# EAGLE board main3 (EAGLE 8.2.0)
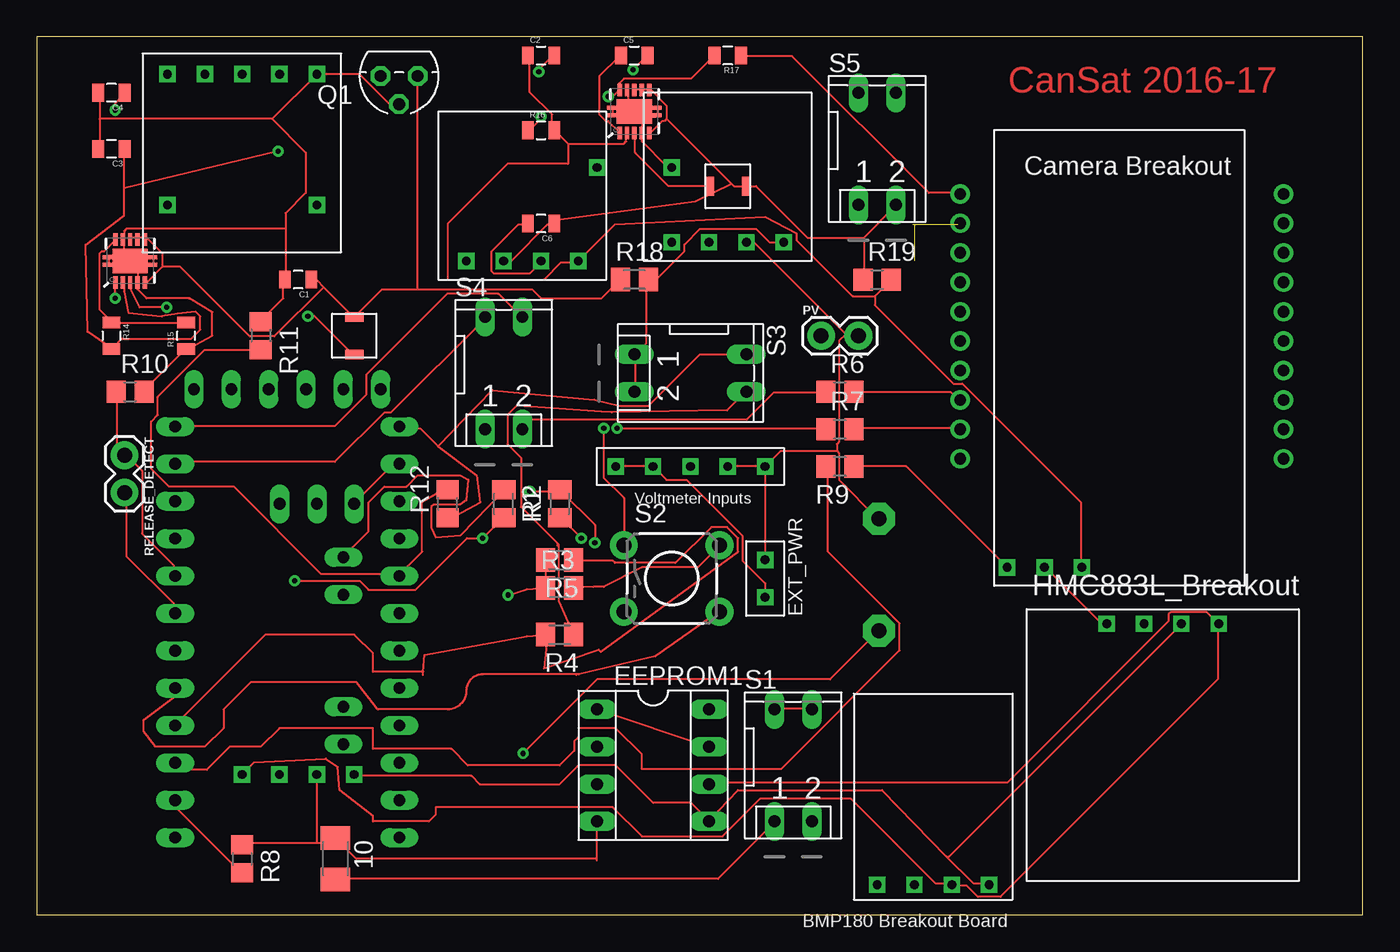
[diagram p0: board, top side]
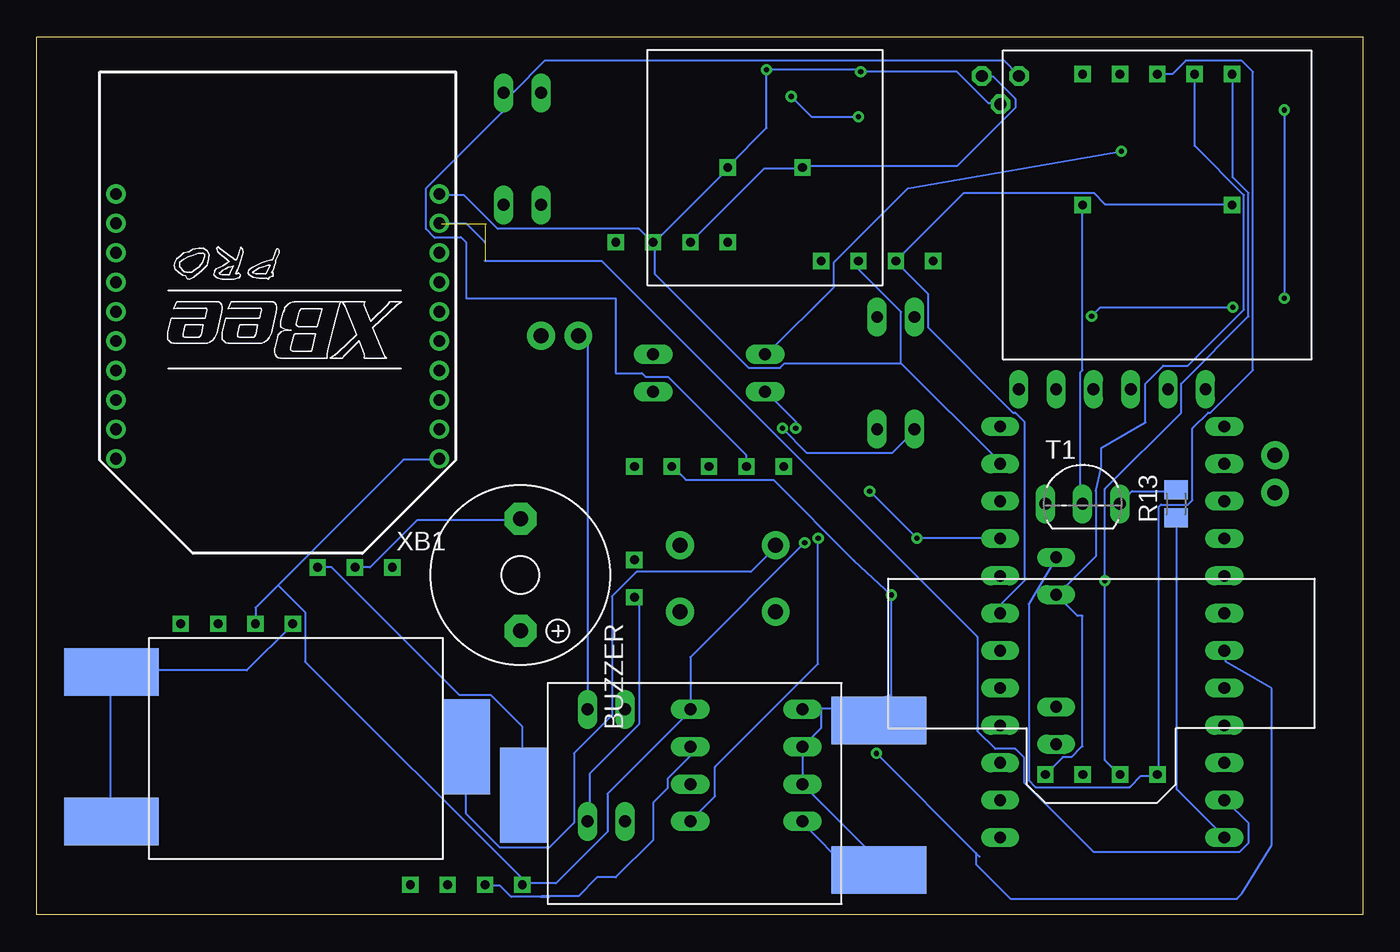
[diagram p1: board, bottom side, seen from below]

Size 90.17 x 59.69 mm. Coordinates in mm from the lower left corner, seen from the top.
Outline: 0,0 90.17,0 90.17,59.69 0,59.69 0,0
Copper layers (1*16): Top 0.035mm / dielectric 1.5mm / Bottom 0.035mm
Design rules "default": minimum track width 6mil, minimum drill 0.35mm, track to track 6mil, track to pad 6mil, pad to pad 6mil, via to via 6mil, smd to smd 6mil, copper to edge 40mil, drill to drill 6mil, minimum pad ring 10mil, minimum via ring 8mil, stop-mask expansion 4mil, vias tented up to drill 0mil, thermal gap 10mil

## Footprints (pad centres in the part's own frame; a part is rotated, then mirrored left to right if it is on the bottom)
M1206 = smd 1.6 x 2: 1 -1.4,0; 2 1.4,0
F/TMB = drill 1.016 pad 2.159 octagon: + 3.81,0; - -3.81,0
0805 = smd 0.8 x 1.2: 1 -0.9,0; 2 0.9,0
1F_CAP = drill 0.6 square: + 5.08,0; - -5.08,0
SOCKET-08 = drill 0.813 long: 1 -3.81,-3.81; 2 -1.27,-3.81; 3 1.27,-3.81; 4 3.81,-3.81; 5 3.81,3.81; 6 1.27,3.81; 7 -1.27,3.81; 8 -3.81,3.81
1212 = smd 0.635 x 1.27: P$1 -1.27,0; P$2 1.27,0
0.47F_CAP = drill 0.6 square: + 2.54,0; - -2.54,0
SENSIRIONSDP810 = drill 0.6 square: GND -8.24,1.26; SCL -8.24,-3.82; SDA -8.24,3.8; VCC -8.24,-1.28
1X02 = drill 1.016 pad 1.88: 1 0,0; 2 2.54,0
TO-92 = drill 0.813 octagon: 1 -1.27,0; 2 0,1.905; 3 1.27,0
M0805 = smd 1.3 x 1.6: 1 -0.95,0; 2 0.95,0
R0805 = smd 1.3 x 1.5: 1 -0.95,0; 2 0.95,0
DP-02 = drill 0.813 long: 1 -1.27,-3.81; 2 1.27,-3.81; 3 1.27,3.81; 4 -1.27,3.81
TACTILE-PTH = drill 1.016 pad 1.88: 1 -3.251,2.261; 2 3.251,2.261; 3 -3.251,-2.261; 4 3.251,-2.261
TO92-ECB = drill 0.813 long: B 2.54,0; C 0,0; E -2.54,0
QFN-10_PAD = smd 0.297 x 0.85: 1 -1,-1.475; 2 -0.5,-1.475; 3 0,-1.475; 4 0.5,-1.475; 5 1,-1.475; 6 1,1.475; 7 0.5,1.475; 8 0,1.475; 9 -0.5,1.475; 10 -1,1.475 | smd 0.7 x 0.28: 11 -1.5,0.25; 12 -1.5,-0.25; 13 1.5,0.25; 14 1.5,-0.25 | smd 2.4 x 1.65: 15 0,0
PRO-MINI-2 = drill 0.8 long: A0 6.35,2.54; A1 6.35,0; A2 6.35,-2.54; A3 6.35,-5.08; A4 2.54,1.27; A5 2.54,3.81; A6 2.54,-8.89; A7 2.54,-6.35; D2 -8.89,2.54; D3 -8.89,0; D4 -8.89,-2.54; D5 -8.89,-5.08; D6 -8.89,-7.62; D7 -8.89,-10.16; D8 -8.89,-12.7; D9 -8.89,-15.24; D10 6.35,-15.24; D11 6.35,-12.7; D12 6.35,-10.16; D13 6.35,-7.62; DTR 5.08,15.24; GND 6.35,10.16; GND1 -8.89,5.08; GND2 -7.62,15.24; GND3 -5.08,15.24; RAW 6.35,12.7; RST 6.35,7.62; RST1 -8.89,7.62; RX1 -8.89,10.16; RX1-1 0,15.24; TX0 -8.89,12.7; TX0-1 2.54,15.24; VCC 6.35,5.08; VCC1 -2.54,15.24
HMC5833L_BREAKOUT = drill 0.6 square: GND -3.81,8.25; SCL 3.81,8.25; SDA 1.27,8.25; VCC -1.27,8.25
BMP180_BREAKOUT = drill 0.6 square: GND -1.27,-6; SCL 1.27,-6; SDA 3.81,-6; VIN -3.81,-6
CAMERA = drill 0.6 square: GND 5.08,15.24; TRG 7.62,15.24; VCC 2.54,15.24
EXTERNALPOWER = drill 0.6 square: GND 1.27,0; VCC -1.27,0
VOLTMETER = drill 0.6 square: A -5.08,0; B -2.54,0; C 2.54,0; D 5.08,0; NULL 0,0
RTC = drill 0.6 square: GND 1.27,1.27; NC 3.81,1.27; SCL 6.35,1.27; SDA 8.89,1.27; VCC 11.43,1.27
BESTCAP = smd 6.452 x 3.251: GND -2.54,12.7; GND2 -2.54,2.54 | smd 3.251 x 6.452: VCC 21.59,7.62
POLOLU3VREG = drill 0.6 square: GND 1.27,0; SHDN -3.81,0; VIN -1.27,0; VOUT 3.81,0
XBEE-PRO = drill 0.8 pad 1.27: 1 -11,9; 2 -11,7; 3 -11,5; 4 -11,3; 5 -11,1; 6 -11,-1; 7 -11,-3; 8 -11,-5; 9 -11,-7; 10 -11,-9; 11 11,-9; 12 11,-7; 13 11,-5; 14 11,-3; 15 11,-1; 16 11,1; 17 11,3; 18 11,5; 19 11,7; 20 11,9

## Placement (x,y rotation side)
10  [M1206]  20.32,3.81 270 top
BUZZER  F/TMB  [F/TMB]  57.28,23.11 270 bottom
C1  10uF  [0805]  17.78,43.18 180 top
C2  22uF  [0805]  34.29,58.42 0 top
C3  22uF  [0805]  5.08,52.07 180 top
C4  0.1uF  [0805]  5.08,55.88 180 top
C5  0.1uF  [0805]  40.64,58.42 0 top
C6  10uF  [0805]  34.29,46.99 180 top
CAM_CAP  1F_CAP  [1F_CAP]  13.97,48.26 0 bottom
EEPROM1  [SOCKET-08]  41.91,10.16 270 top
FRAME1  FRAME-LETTER  [CREATIVE_COMMONS]  21.59,-7.62 0 top  (outside the outline)
L1  2.2uH  [1212]  21.59,39.37 90 top
L2  2.2uH  [1212]  46.99,49.53 0 top
MAIN_CAP  0.47F_CAP  [0.47F_CAP]  40.64,50.8 0 bottom
PITOTTUBE  SENSIRION  [SENSIRIONSDP810]  17.78,17.78 90 bottom
PV  [1X02]  53.34,39.37 0 top
Q1  TP0602N3  [TO-92]  24.64,57.02 180 top
R1  4.7K  [M0805]  35.56,27.94 90 top
R2  4.7K  [M0805]  31.75,27.94 270 top
R3  500K  [M0805]  35.56,22.23 0 top
R4  1K  [M0805]  35.56,19.05 180 top
R5  10K  [M0805]  35.56,24.13 180 top
R6  10K  [R0805]  54.61,35.56 0 top
R7  10K  [R0805]  54.61,33.02 0 top
R8  10K  [R0805]  13.97,3.81 270 top
R9  1K  [R0805]  54.61,30.48 180 top
R10  10k  [R0805]  6.35,35.56 0 top
R11  20K  [R0805]  15.24,39.37 270 top
R12  10K  [R0805]  27.94,27.94 90 top
R13  1K  [M0805]  12.7,27.94 90 bottom
R14  1.12M  [0805]  5.08,39.37 270 top
R15  200k  [0805]  10.16,39.37 90 top
R16  1.12M  [0805]  34.29,53.34 0 top
R17  200k  [0805]  46.99,58.42 180 top
R18  [M0805]  40.64,43.18 0 top
R19  [R0805]  57.15,43.18 0 top
RELEASE_DETECT  [1X02]  5.97,31.24 270 top
S1  [DP-02]  51.44,10.16 0 top
S2  [TACTILE-PTH]  43.18,22.86 0 top
S3  [DP-02]  44.45,36.83 270 top
S4  [DP-02]  31.75,36.83 0 top
S5  [DP-02]  57.15,52.07 0 top
T1  2SC945  [TO92-ECB]  19.05,27.94 0 bottom
U1  TPS61200  [QFN-10_PAD]  6.35,44.45 0 top
U2  TPS61200  [QFN-10_PAD]  40.64,54.61 0 top
U$1  PRO-MINI-2  [PRO-MINI-2]  18.31,20.5 0 top
U$2  HMC883L_BREAKOUT  [HMC5833L_BREAKOUT]  76.57,11.54 0 top
U$3  BMP180_BREAKOUT  [BMP180_BREAKOUT]  60.96,8.04 0 top
U$4  CAMERA_BREAKOUT  [CAMERA]  73.61,38.86 180 top
U$5  EXT_PWR  [EXTERNALPOWER]  49.53,22.86 90 top
U$6  VOLTMETER  [VOLTMETER]  44.45,30.48 0 top
U$7  RTC  [RTC]  20.32,58.42 180 top
U$8  BESTCAP  [BESTCAP]  82.55,3.81 0 bottom
U$9  BESTCAP  [BESTCAP]  35.43,15.75 180 bottom
U$10  POLOLU3VREG  [POLOLU3VREG]  46.99,45.72 0 top
U$11  POLOLU3VREG  [POLOLU3VREG]  33.02,44.45 0 top
XB1  XBEE-PRO  [XBEE-PRO]  73.79,40.01 180 bottom

## Library data of the parts
10 R1-R12 = rcl
BUZZER = buzzer; OC_FARNELL: unknown; OC_NEWARK: unknown
C1-C3 C6 = CH_passive
C4 C5 R14-R17 U1 U2 = SparkFun
CAM_CAP = Capacitor105
EEPROM1 = ic-package
FRAME1 = SparkFun-Aesthetics
L1 L2 = inductor_Lip
MAIN_CAP = Capacitor474
PITOTTUBE = Sensirion
PV RELEASE_DETECT = SparkFun-Connectors
Q1 = transistor-fet
R13 R18 R19 = resistor
S1 S3-S5 = switch-dil; MPN: MCDP02; OC_FARNELL: 1255233; OC_NEWARK: 26M1095
S2 = SparkFun-Retired
T1 = transistor
U$1 = Arduino-clone
U$2 = HMC883L_Breakout
U$3 = BMP180_Breakout
U$4 = Camera
U$5 = EXT_PWR
U$6 = Voltmeter
U$7 = RTC
U$8 U$9 = BestCap
U$10 U$11 = Polol3VReg
XB1 = maxstream; MPN: XBP24-AWI-001; OC_FARNELL: 1337916; OC_NEWARK: 42M2667

## Nets
CAM_VIN: C2.1 R16.2 R19.2 U2.2 U$4.VCC U$9.VCC U$11.VOUT
CAP_VIN: C6.1 CAM_CAP.+ L2.P$2 R19.1 S5.2 U2.5 U2.6 U2.7 U2.8 U$1.A1 U$11.VIN
FB: R14.1 R15.2 U1.10
FB1: R16.1 R17.2 U2.10
GND: 10.1 BUZZER.- C1.2 C2.2 C3.2 C4.2 C5.2 C6.2 EEPROM1.1 EEPROM1.2 EEPROM1.3 EEPROM1.4 EEPROM1.7 MAIN_CAP.- PITOTTUBE.GND PV.2 Q1.2 R3.1 R5.2 R8.1 R10.2 R11.1 R15.1 R17.1 T1.E U1.4 U1.9 U1.11 U1.12 U1.13 U1.14 U1.15 U2.4 U2.9 U2.11 U2.12 U2.13 U2.14 U2.15 U$1.GND U$2.GND U$3.GND U$4.GND U$5.GND U$6.C U$6.D U$7.GND U$8.GND U$8.GND2 U$9.GND U$9.GND2 U$10.GND U$11.GND XB1.10
MAIN_VIN: C3.1 R14.2 R18.2 S2.1 S3.1 S3.2 U1.2 U$8.VCC U$10.VOUT
N$4: L2.P$1 U2.3
N$6: C5.1 U2.1
N$7: R3.2 S2.2
N$8: CAM_CAP.- T1.C
N$9: S2.4 U$1.D5
N$10: R12.1 S3.4 U$1.RAW
N$11: R4.1 S3.3
N$12: R4.2 R5.1 U$1.D6
N$15: R6.2 XB1.3
N$16: R6.1 S4.2
N$17: S4.3 U$1.TX0
N$18: R7.1 S4.1
N$19: R7.2 XB1.2
N$20: S4.4 U$1.RX1
N$21: R8.2 U$1.D8 XB1.9
N$22: R9.2 U$1.D7
N$23: R9.1 U$4.TRG
N$24: BUZZER.+ U$1.D4
N$25: R10.1 RELEASE_DETECT.1 U$1.D2
N$26: RELEASE_DETECT.2 U$1.D3
N$27: R11.2 R12.2 U$1.A0
N$28: PV.1 S1.3 S1.4
N$29: 10.2 S1.1
N$30: R13.2 T1.B
N$31: R13.1 U$1.D9
N$32: L1.P$1 U1.3
N$33: Q1.3 S1.2 S5.3 U$5.VCC U$6.A U$6.B
N$34: C4.1 U1.1
SCL: EEPROM1.6 PITOTTUBE.SCL R2.1 U$1.A5 U$2.SCL U$3.SCL U$7.SCL
SDA: EEPROM1.5 PITOTTUBE.SDA R1.1 U$1.A4 U$2.SDA U$3.SDA U$7.SDA
V33: EEPROM1.8 PITOTTUBE.VCC R1.2 R2.2 U$1.VCC U$2.VCC U$3.VIN U$7.VCC XB1.1
VIN: C1.1 L1.P$2 MAIN_CAP.+ Q1.1 R18.1 U1.5 U1.6 U1.7 U1.8 U$10.VIN

## Tracks (layer width: path | path; a pad name or v marks a point on that pad's centre or on a via)
CAM_VIN
  Top 0.152: 36.12,52.43 39.93,52.43 40.08,52.58 40.08,53.03 U2.2 | 36.12,52.43 35.2,53.34 R16.2 35.05,53.34 35.05,54.41 33.53,55.93 33.53,58.37 C2.1 | 57,42.06 58.06,43.13 R19.2 | 57,42.06 55.47,42.06 51.66,45.87 51.66,46.33 49.53,47.45 39.32,46.94 U$11.VOUT 36.73,44.35 35.66,44.35 34.49,43.18 27.94,43.18 27.94,46.99 32,51.05 36.12,51.05 36.12,52.43 | 57,42.06 57,41.45 62.33,36.12 62.94,36.12 71.02,28.04 71.02,23.62 U$4.VCC
  Bottom 0.152: U$4.VCC 70.1,23.62 61.42,14.94 59.28,14.94 57.15,12.8 57.15,8.23 U$9.VCC
CAP_VIN
  Top 0.152: 56.24,46.02 56.24,43.28 R19.1 | 56.24,46.02 58.37,48.16 S5.2 | U2.8 40.69,56.08 41,56.08 U2.7 41.6,56.08 U2.6 41.76,56.08 42.82,55.02 42.82,54.1 | 42.82,54.1 42.67,53.95 42.52,53.95 41.76,53.19 U2.5 | 42.82,54.1 47.24,49.68 | 47.24,49.68 47.4,49.53 L2.P$2 48.92,49.53 52.43,46.02 56.24,46.02 | U$11.VIN 31.85,44.5 32.31,44.5 34.75,46.94 35.05,46.94 C6.1 35.2,47.09 35.36,47.24 44.81,48.51 47.24,49.68
  Bottom 0.152: CAM_CAP.+ 8.99,48.31 17.53,48.31 18.29,49.07 27.13,49.07 U$11.VIN 31.7,44.35 29.57,42.22 29.57,39.93 23.77,34.14 23.62,34.14 23.01,33.53 23.01,22.71 24.54,21.18 24.54,20.57 U$1.A1
FB
  Top 0.152: U1.10 5.33,45.87 4.57,45.11 4.42,45.11 4.27,44.96 4.27,41.15 5.03,40.39 R14.1 5.18,40.26 10.06,40.26 R15.2
FB1  (via drill 0.35)
  Top 0.152: R17.2 46.02,58.37 44.5,56.84 39.93,56.84 39.62,56.54 39.62,56.24 U2.10 39.62,56.08 39.17,55.63 v38.86,55.63 | v34.29,54.25 34.29,54.1 33.53,53.34 R16.1
  Bottom 0.152: v34.29,54.25 37.49,54.25 v38.86,55.63
GND  (via drill 0.35)
  Top 0.152: 19.05,4.88 19.96,4.88 20.27,5.18 10.1 | 19.05,4.88 14.02,4.88 R8.1 | 19.05,4.88 19.05,9.45 PITOTTUBE.GND | R5.2 34.59,24.08 34.59,22.3 R3.1 33.33,22.15 v32.05,21.74 | 20.42,5.33 10.1 | 38.1,3.71 38.1,3.81 | 38.1,3.81 EEPROM1.4 | U$2.GND 72.69,19.81 72.39,19.81 68.58,23.62 U$4.GND | U$6.D U$6.C | U$6.D U$5.GND | 54.41,31.55 54.56,31.39 54.56,29.57 57.15,26.98 BUZZER.- | 54.41,31.55 50.6,31.55 U$6.D | U1.13 7.92,44.65 7.92,44.2 U1.14 7.77,44.2 7.16,44.2 6.86,43.89 | U1.12 4.88,44.2 4.88,44.65 U1.11 4.88,44.81 5.94,44.81 | 5.94,44.81 5.94,45.87 U1.9 5.94,46.02 5.94,46.48 6.1,46.63 16.92,46.63 | 5.94,44.81 6.25,44.5 U1.15 | 6.86,43.89 U1.4 6.86,42.82 6.86,42.52 7.47,41.91 10.36,41.91 11.94,40.97 11.94,39.37 10.21,38.41 R15.1 10.06,38.41 7.32,35.66 R10.2 | 6.86,43.89 6.4,44.35 U1.15 | 5.94,44.81 U1.15 | 6.86,43.89 U1.15 | R11.1 15.24,40.39 16.76,41.91 16.76,43.13 C1.2 16.92,43.28 16.92,46.63 | 4.27,54.1 4.27,55.78 C4.2 | 4.27,54.1 4.27,52.12 C3.2 | v34.14,57.3 34.14,57.45 35.05,58.37 C2.2 | v40.54,57.45 41.45,58.37 C5.2 | Q1.2 24.54,55.17 23.93,55.17 21.95,57.15 U$7.GND 16,54.1 | 16,54.1 4.27,54.1 | 16.92,46.63 16.92,47.7 18.29,49.07 18.29,51.82 16,54.1 | C6.2 33.38,46.94 32.77,46.94 30.94,45.11 30.94,43.74 31.09,43.59 33.53,43.59 34.29,44.35 U$11.GND | U$1.GND 24.54,30.63 24.23,30.63 21.64,28.04 T1.E | R17.1 48.01,58.37 51.36,58.37 60.66,49.07 62.64,49.07 XB1.10 | U2.13 42.22,54.86 42.22,54.41 U2.14 42.06,54.25 41,54.25 | 39.17,54.86 39.17,54.41 U2.12 | U2.15 41,54.25 | 41,54.25 41.15,54.1 41.15,53.19 U2.4 41.15,53.03 41.15,52.58 42.82,50.9 43.13,50.9 MAIN_CAP.- | U2.15 40.39,54.86 | 40.39,54.86 40.23,55.02 40.23,56.08 U2.9
  Top 0.152: 40.39,54.86 39.17,54.86 | 39.17,54.86 U2.11 | 40.54,54.71 U2.15 | 40.69,54.56 U2.15 | 55.02,39.47 55.78,39.47 PV.2 55.02,39.47 | 55.02,39.47 48.77,45.72 U$10.GND | 54.41,31.55 54.41,32 54.56,32.16 54.56,39.01 55.02,39.47 | 10.1 21.72,3.81 38.1,3.81 | EEPROM1.1 EEPROM1.7
  Bottom 0.152: 55.88,1.22 55.32,1.22 | 55.88,1.22 57.91,1.22 58.67,1.98 59.59,1.98 U$3.GND | 32.05,14.94 v32.05,21.74 34.59,24.08 40.08,29.57 46.02,29.57 46.94,30.48 U$6.C | 32.05,14.94 32.92,13.26 U$9.GND2 | 36.83,14.02 35.51,14.02 32.05,14.94 | 36.83,14.02 38.1,14.02 EEPROM1.1 | EEPROM1.4 38.1,6.25 34.9,3.05 U$9.GND 32.89,3.68 EEPROM1.3 EEPROM1.2 36.83,12.7 36.83,14.02 | U$8.GND2 85.19,6.4 85.19,16.46 U$8.GND 85.04,16.61 75.89,16.61 72.85,19.66 U$2.GND | U$4.GND 67.51,23.62 64.31,26.82 57.3,26.82 BUZZER.- | Q1.2 24.69,55.17 25.45,55.17 27.58,57.3 v34.14,57.3 34.29,57.45 v40.54,57.45 40.54,53.49 43.13,50.9 MAIN_CAP.- 43.13,50.75 48.16,45.72 | U$11.GND 34.29,43.89 31.39,41 31.39,37.49 | 31.39,37.49 24.69,30.79 U$1.GND | XB1.10 62.64,48.92 61.11,48.92 58.83,46.63 49.23,46.63 48.31,45.72 U$10.GND 48.16,45.72 | 31.39,37.49 39.32,37.49 39.62,37.19 41.76,37.19 48.16,43.59 48.16,45.72 | EEPROM1.7 45.72,10.81 47.27,9.26 47.27,8.61 48.26,7.62 48.26,5.08 50.8,2.54 52.07,2.54 53.34,1.27 55.83,1.27 55.88,1.22
MAIN_VIN  (via drill 0.35)
  Top 0.152: U1.2 5.94,42.82 5.94,42.37 6.22,40.95 8.51,40.69 9.58,40.87 10.82,41 11.12,40.69 11.12,39.78 10.52,39.17 5.79,39.17 5.18,38.56 R14.2 5.03,38.56 3.45,39.62 3.33,45.57 5.94,47.55 5.94,49.38 | 5.94,49.38 5.94,51.97 C3.1 | 40.69,38.1 41.45,38.86 41.45,43.13 R18.2 41.6,43.28 42.22,43.28 44.04,45.11 44.04,45.57 45.11,46.63 48.92,46.63 49.84,45.72 U$10.VOUT | 40.69,38.1 40.69,35.66 S3.2 | 40.69,38.1 S3.1 | S2.1 39.93,28.35 38.56,29.72 v38.56,33.07 | v16.41,51.92 5.94,49.38
  Bottom 0.152: v38.56,33.07 38.56,33.53 40.54,35.51 S3.2 | U$8.VCC 60.96,6.86 58.67,4.57 55.32,4.57 53.65,6.25 53.65,10.97 51.05,13.56 51.05,21.64 49.38,23.32 41.6,23.32 39.93,24.99 S2.1 | v16.41,51.92 30.94,49.38 35.97,44.35 35.97,42.67 40.54,38.1 S3.1
N$4
  Top 0.152: L2.P$1 42.98,49.53 40.69,51.82 40.69,53.03 U2.3
N$6
  Top 0.152: U2.1 39.62,53.19 38.86,53.95 38.71,53.95 38.25,54.41 38.25,57 39.62,58.37 C5.1
N$7
  Top 0.152: R3.2 37.85,22.3 38.56,22.3 41.15,23.62 44.96,23.62 46.33,24.99 S2.2
N$8
  Bottom 0.152: CAM_CAP.- 19.05,37.03 19.2,36.88 19.2,28.19 19.05,28.04 T1.C
N$9
  Top 0.152: 36.87,16.35 42.06,17.58 46.33,20.57 S2.4 | 36.87,16.35 36.68,16.31 | U$1.D5 9.3,15.39 9.3,14.78 7.26,13.26 7.26,12.5 8.08,11.43 11.43,11.43 12.7,12.7 12.7,13.97 14.53,15.8 21.74,15.8 23.09,14.1 arc90 23.22,13.97 27.94,13.97 arc90 29.21,15.24 arc-90 30.32,16.35 36.87,16.35
N$10
  Top 0.152: 27.28,31.85 26.06,33.07 24.69,33.07 U$1.RAW | 27.28,31.85 29.9,29.87 30.15,28.02 28.5,27.13 28.04,27.13 R12.1 | S3.4 45.11,38.1 41.6,34.59 39.62,34.59 37.92,35.03 30.96,35.66 27.28,31.85
N$11
  Top 0.152: 35.41,25.25 32.92,27.74 32.92,31.09 32,32 32,33.98 32.61,34.59 38.41,34.21 39.09,34.16 46.94,34.29 48.16,35.51 S3.3 | 35.41,25.25 35.51,25.15 | 35.41,25.25 35.41,25.11 35.49,25.02 35.49,21.34 R4.1
N$12
  Top 0.152: 26.26,16.31 26.28,16.54 | 26.28,16.54 26.36,17.68 33.33,18.95 R4.2 34.74,19.05 34.49,16.75 38.21,18.02 38.35,17.88 47.7,24.69 47.7,25.6 46.94,26.36 45.87,26.36 43.43,23.93 39.32,23.93 39.17,24.08 36.58,24.08 R5.1 | U$1.D6 9.45,12.95 15.54,19.05 21.59,19.05 22.86,17.78 22.86,16.51 22.89,16.54 26.28,16.54
N$15
  Top 0.152: R6.2 55.63,35.51 62.18,35.51 62.64,35.05 XB1.3
N$16
  Top 0.152: S4.2 33.68,33.68 48.31,33.68 50.14,35.51 53.65,35.51 R6.1
N$17
  Top 0.152: U$1.TX0 9.45,33.22 20.27,33.22 22.4,35.36 22.4,36.73 27.89,42.22 31.39,42.22 32.92,40.69 S4.3
N$18  (via drill 0.35)
  Top 0.152: v39.47,33.07 53.65,33.07 R7.1
  Bottom 0.152: v39.47,33.07 37.8,31.39 32,31.39 30.48,32.92 S4.1
N$19
  Top 0.152: R7.2 55.63,33.07 62.64,33.07 XB1.2
N$20
  Top 0.152: U$1.RX1 9.45,30.79 20.27,30.79 23.62,34.14 24.08,34.14 30.48,40.54 S4.4
N$21  (3 unrouted)
  Top 0.152: R8.2 13.87,2.9 9.45,7.32 9.45,7.77 U$1.D8
  Bottom 0.152: 62.64,46.94 XB1.9 60.98,47.01 59.69,45.72 | U$1.D8 9.3,7.77 7.77,6.25 7.77,4.88 8.38,4.27 18.29,4.27 23.01,8.99 23.01,10.67 23.62,11.28 24.99,11.28 26.21,12.5 26.21,18.9 51.77,44.45 59.69,44.45
N$22
  Top 0.152: R9.2 53.8,30.48 53.8,24.69 58.67,19.81 58.67,17.98 50.6,9.91 41.15,9.91 41.15,10.92 39.37,12.7 36.83,12.7 36.83,12.08 36.55,11.8 36.55,11.15 35.56,10.16 29.31,10.16 28.19,11.28 22.86,11.28 22.86,12.7 16.51,12.7 15.24,11.43 13.13,11.43 11.56,9.86 10.21,9.86 9.75,10.67 9.45,10.36 U$1.D7
N$23
  Top 0.152: R9.1 59.13,30.48 U$4.TRG
N$24  (via drill 0.35)
  Top 0.152: v33.07,10.97 38.1,16 53.95,16 57.15,19.2 BUZZER.+
  Bottom 0.152: v33.07,10.97 26.29,4.19 | 26.29,4.19 26.06,3.96 | U$1.D4 9.3,17.83 9.3,17.22 6.2,15.39 6.2,4.72 8.23,1.42 8.56,1.09 23.95,1.09 26.29,3.43 26.29,4.19
N$25
  Top 0.152: R10.1 5.49,35.51 5.49,31.7 5.94,31.24 RELEASE_DETECT.1 6.1,31.24 7.16,30.18 7.16,25.91 9.3,23.77 9.3,23.16 U$1.D2
N$26
  Top 0.152: U$1.D3 9.3,20.57 9.3,21.18 6.1,24.38 6.1,28.65 RELEASE_DETECT.2
N$27
  Top 0.152: R11.2 15.24,38.41 11.43,38.41 8.23,35.2 8.23,33.98 7.77,33.53 7.77,30.33 8.99,29.11 13.41,29.11 19.36,23.16 24.54,23.16 U$1.A0 24.69,23.16 26.21,24.69 26.21,28.09 27.43,28.8 27.89,28.8 R12.2
N$28
  Top 0.152: S1.4 50.29,14.02 52.58,14.02 S1.3
  Bottom 0.152: S1.3 52.73,14.02 52.73,38.71 53.34,39.32 PV.1
N$29
  Top 0.152: 10.2 20.42,2.44 46.33,2.44 50.14,6.25 S1.1
N$30
  Bottom 0.152: R13.2 12.8,28.8 15.7,28.8 16.46,28.04 T1.B
N$31
  Bottom 0.152: R13.1 12.65,26.98 12.65,8.53 9.45,5.33 U$1.D9
N$32  (via drill 0.35)
  Top 0.152: v8.84,41.3 6.99,41.3 6.4,42.52 6.4,42.82 U1.3 | v18.44,40.69 18.9,40.69 21.49,38.1 L1.P$1
  Bottom 0.152: v8.84,41.3 17.83,41.3 v18.44,40.69
N$33
  Top 0.152: U$6.A U$6.B 42.82,29.57 44.2,29.57 48.01,25.76 48.01,24.08 49.53,22.55 U$5.VCC
  Bottom 0.152: Q1.3 23.47,57.15 24.38,58.06 55.63,58.06 57.76,55.93 58.37,55.93 S5.3 58.52,55.78 58.52,54.56 63.7,49.38 63.7,46.63 63.14,46.08 | S1.2 52.58,6.4 52.58,9.6 49.23,12.95 49.23,21.18 49.53,21.49 U$5.VCC | 63.09,46.02 63.14,46.08 | U$6.B 41.91,31.24 47.24,36.58 48.77,36.58 49.02,36.83 50.8,36.83 50.8,41.91 60.96,41.91 60.96,45.72 61.32,46.08 63.14,46.08
N$34  (via drill 0.35)
  Top 0.152: v5.33,41.91 5.33,42.82 U1.1 | v5.33,54.71 5.33,55.17 5.94,55.78 C4.1
  Bottom 0.152: v5.33,54.71 v5.33,41.91
SCL
  Top 0.152: EEPROM1.6 45.72,8.99 65.99,8.99 76.96,19.96 76.96,20.42 77.11,20.57 79.55,20.57 80.31,19.81 U$2.SCL 80.31,19.66 80.31,16 65.53,1.22 64.01,1.22 63.25,1.98 62.33,1.98 U$3.SCL 62.18,2.13 61.11,2.13 55.32,7.92 49.23,7.92 46.63,5.33 41.15,5.33 39.17,7.32 27.13,7.32 27.13,6.81 26.67,6.35 22.86,6.35 22.86,6.71 20.6,8.46 20.47,10.06 19.66,10.62 14.78,10.36 14.02,9.6 PITOTTUBE.SCL | R2.1 31.7,28.8 28.83,25.81 27.13,25.68 26.82,26.36 26.82,27.74 26.98,27.89 28.8,27.89 29.21,28.17 29.34,29.59 28.8,29.87 25.91,29.87 25.15,29.11 23.62,29.11 22.55,28.04 22.55,26.06 20.88,24.38 U$1.A5
  Bottom 0.152: U$1.A5 20.88,24.23 22.71,21.13 22.71,9.14 22.25,8.69 15.85,8.69 15.09,9.45 14.02,9.45 PITOTTUBE.SCL 13.87,9.6 13.87,27.74 13.72,27.89 11.89,27.89 11.58,28.19 11.58,33.07 10.52,34.14 10.36,34.14 7.47,37.03 7.47,57.3 8.23,58.06 12.04,58.06 12.95,57.15 U$7.SCL
SDA  (via drill 0.35)
  Top 0.152: v37.03,25.6 35.66,26.98 R1.1 | 61.87,3.96 57.48,8.48 47.68,8.48 45.72,6.4 | 61.87,3.96 63.7,2.13 64.77,2.13 U$3.SDA | 61.87,3.96 62.03,3.96 77.72,19.66 U$2.SDA | 45.72,6.4 44.5,7.62 41.91,7.62 39.37,10.16 36.83,10.16 35.56,8.89 30.12,8.89 29.57,9.45 21.64,9.45 PITOTTUBE.SDA | 45.72,6.4 EEPROM1.5
  Bottom 0.152: 21.64,9.6 PITOTTUBE.SDA 20.4,10.72 19.83,10.72 19.12,11.43 19.05,11.43 19.05,20.32 19.4,20.32 U$1.A4 | U$1.A4 20.88,21.64 | U$7.SDA 11.43,52.27 8.08,48.92 8.08,41.15 11.89,37.34 13.56,37.34 14.78,36.12 14.78,33.48 17.78,31.75 17.78,30.43 18.14,28.8 18.14,24.38 20.73,21.79 U$1.A4 | v37.03,25.6 37.03,17.07 44.04,10.06 44.04,8.08 45.72,6.4 EEPROM1.5
V33  (via drill 0.35)
  Top 0.152: R2.2 31.7,26.98 v30.33,25.6 29.26,25.6 25.76,22.1 22.55,22.1 21.95,22.71 v17.53,22.71 | v33.53,28.8 35.51,28.8 R1.2 35.66,28.8 37.95,26.52 v37.95,25.3
  Bottom 0.152: 57.15,2.13 54.86,2.13 51.36,5.64 51.36,8.23 45.72,13.87 EEPROM1.8 45.72,17.53 v37.95,25.3 | 73.76,22.4 65.23,30.94 62.79,30.94 XB1.1 | 73.76,22.4 75.29,20.88 75.29,19.81 U$2.VCC | 57.15,2.13 57.15,2.44 71.93,17.22 71.93,20.57 73.76,22.4 | 57.15,2.13 U$3.VIN | U$1.VCC 24.69,25.6 v30.33,25.6 v33.53,28.8 | U$7.VCC 8.84,57.15 8.84,50.14 7.77,49.07 7.77,40.69 12.34,36.12 12.34,34.14 17.53,28.96 v17.53,22.71 17.53,10.52 16.61,9.6 PITOTTUBE.VCC
VIN
  Top 0.152: U1.8 6.4,46.02 6.71,46.02 U1.7 6.86,46.02 7.32,46.02 U1.6 7.47,46.02 8.53,44.96 8.53,44.04 | 8.53,44.04 7.47,42.98 U1.5 | 19.51,42.67 21.49,40.69 L1.P$2 23.47,42.52 25.4,42.52 | 19.51,42.67 19.05,43.13 18.75,43.13 C1.1 | 25.4,42.52 25.91,42.52 Q1.1 | R18.1 39.62,43.13 38.41,41.91 34.29,41.91 33.68,42.52 25.4,42.52 | 8.53,44.04 9.75,44.04 14.48,39.32 16.15,39.32 19.51,42.67
  Bottom 0.152: U$10.VIN 40.69,50.75 38.1,50.75 MAIN_CAP.+ 38.1,50.9 27.58,50.9 23.62,54.86 23.62,55.47 25.15,57 25.91,57 Q1.1

## Text on the board
Top: CanSat 2016-17